# Altium PCB Control Board 4Layer.PcbDoc (part 2 of 2)
Units mm, origin at the board's own origin, x right, y up, seen from the top; angles counter-clockwise.
Board outline 113.54 x 134.37 mm, 4 copper layers (Top Layer, GND, Power, Bottom Layer), stack 0.603 mm thick; 245 components, 154 nets, 759 pads, 365 vias.
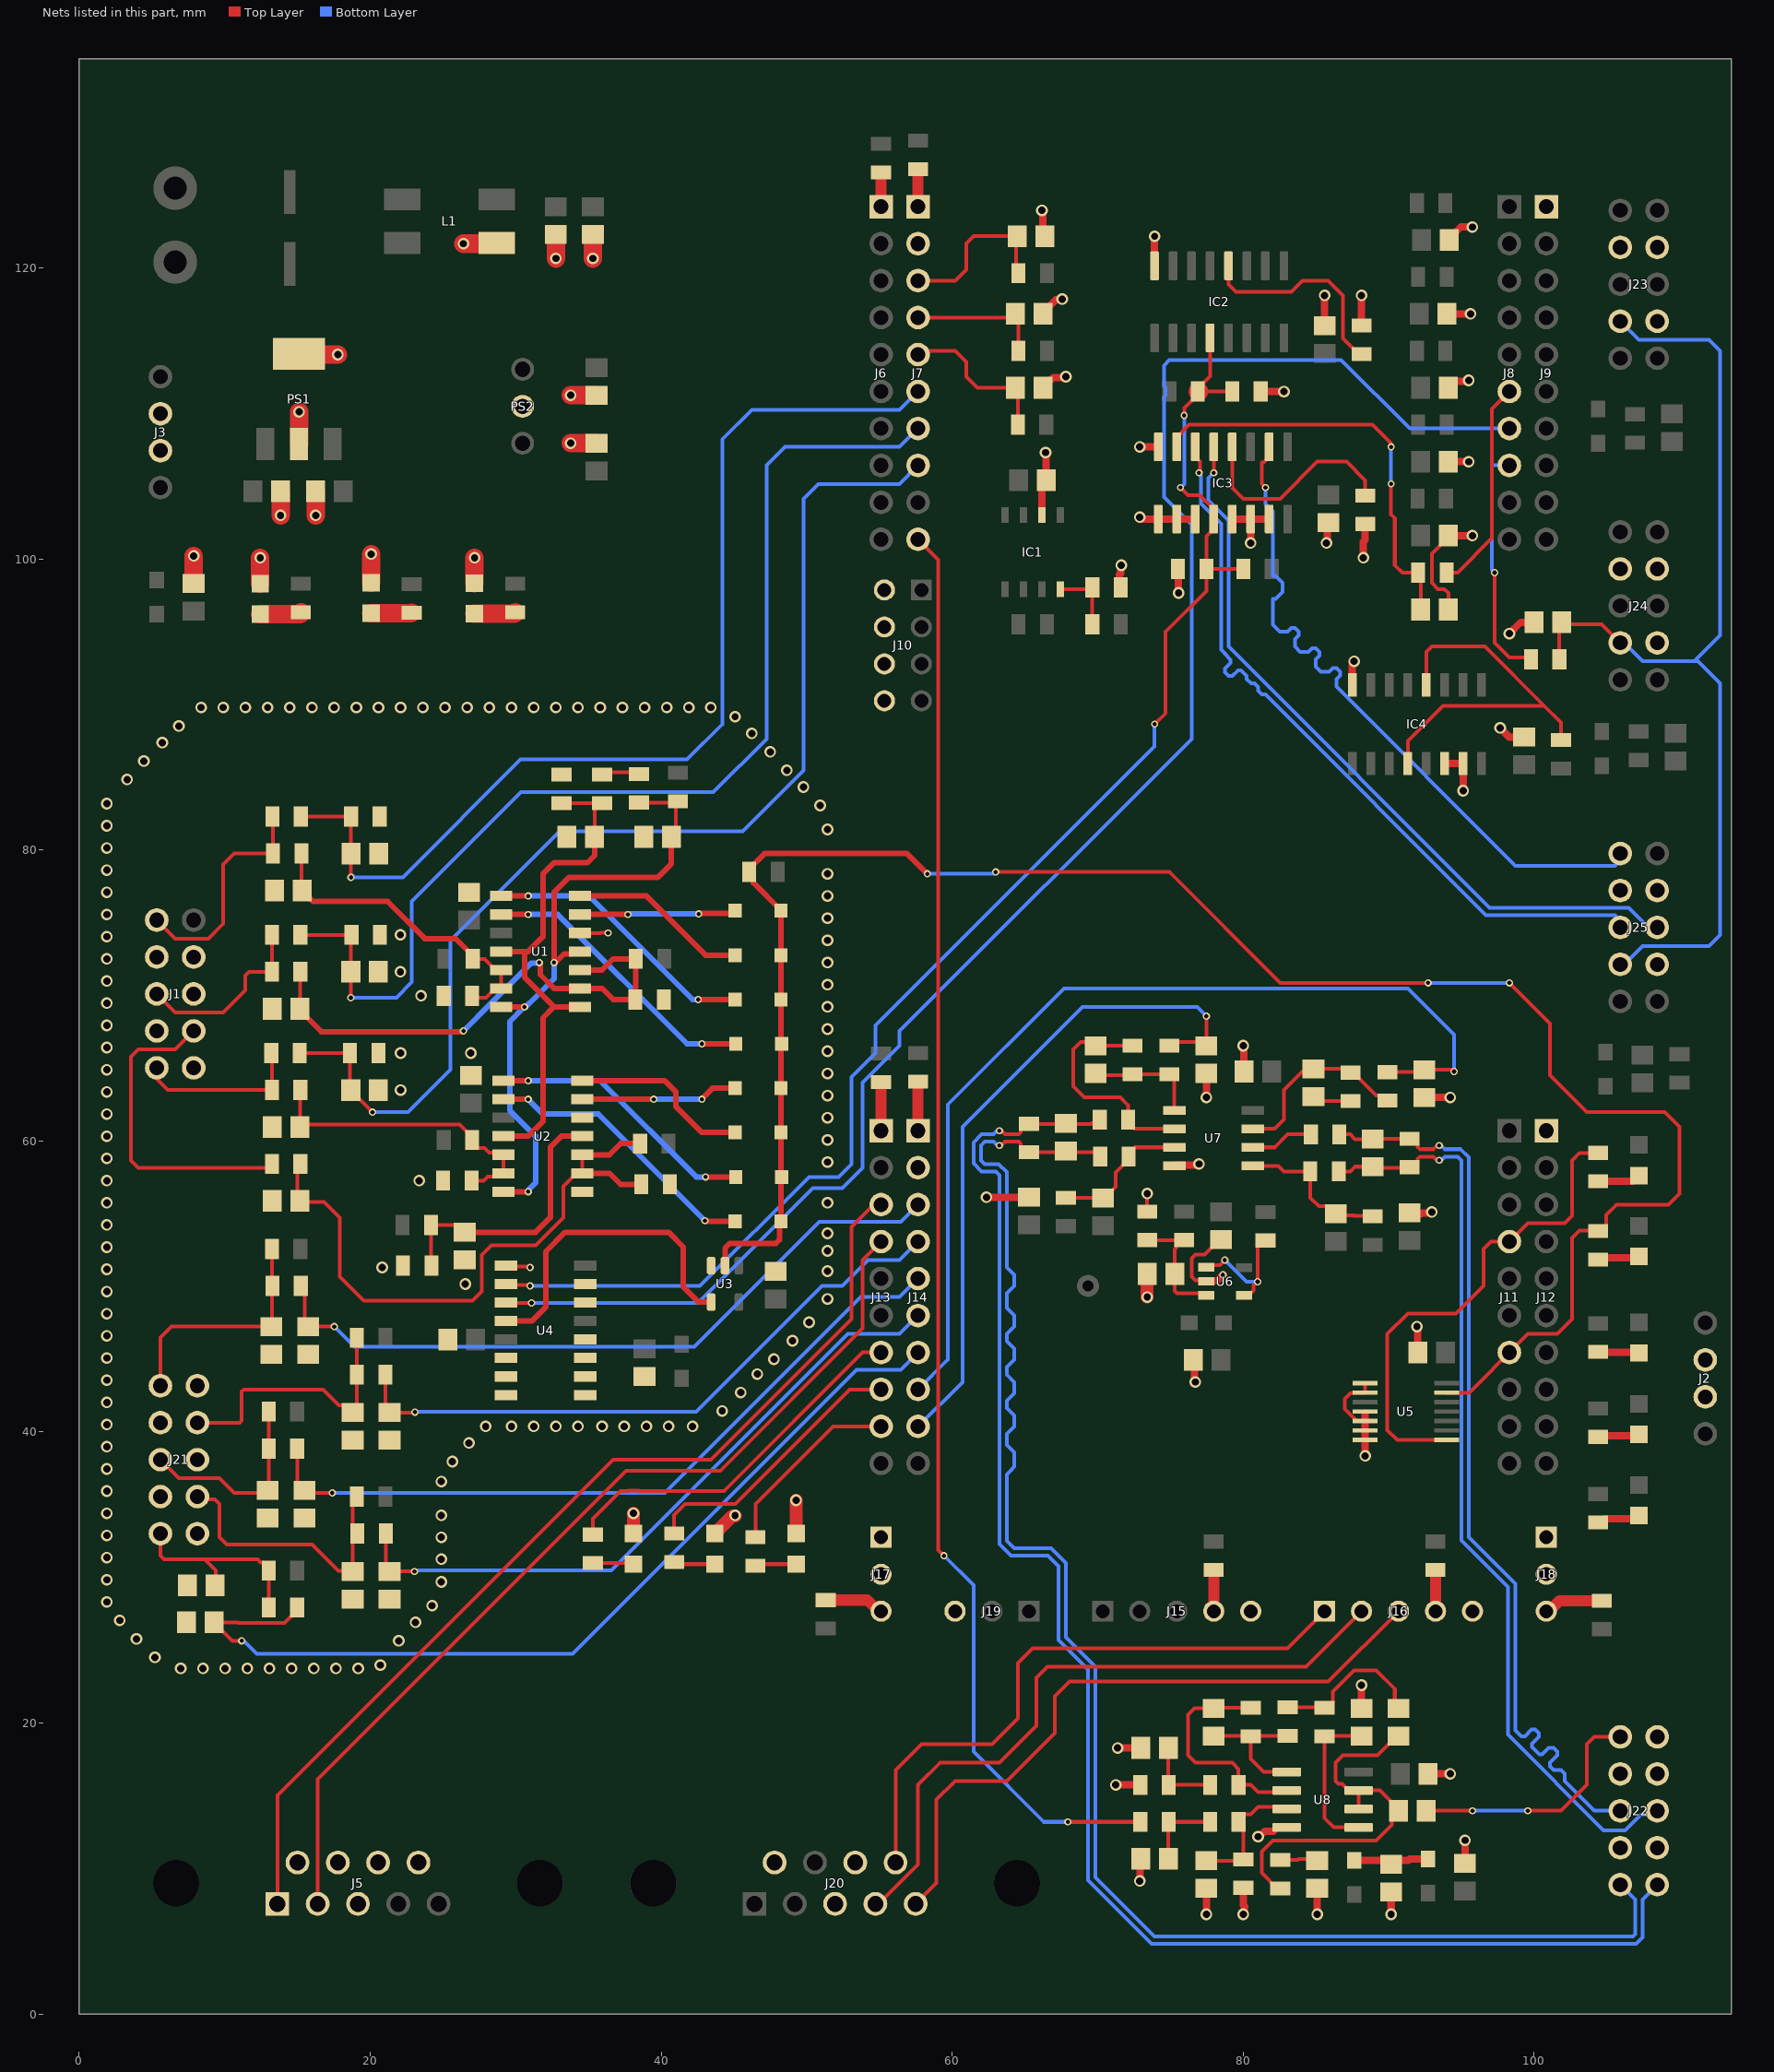
[diagram p4: the nets of this part, all layers, seen from the top]

## Via types
v1: diameter 0.8, hole 0.5, Top Layer to Bottom Layer, 279 vias
v2: diameter 0.5, hole 0.3, Top Layer to Bottom Layer, 82 vias
v3: diameter 3.5, hole 3.2, Top Layer to Bottom Layer, 4 vias

## Nets (pads, with @x,y where several pads share a name; then routed paths per layer and width w, separated by ;. In a path a pad name is that pad's centre, name@x,y a point inside that pad or via, vN(x,y) a via of type N, cw(c..) or ccw(c..) an arc to the next point about the centre after c; other vN are vias at no path point) (continued)
CHS_PWM_P: IC3.2 J25.1 | length 48.6
  Top Layer w0.254: v2(81.534,104.902) 81.534,104.92 81.28,105.174 81.28,106.619 81.396,106.619 81.788,107.011 IC3.2@81.788,107.696
  Bottom Layer w0.254: v2(81.534,104.902) 81.534,103.768 82.03,103.272 82.03,98.825 82.238,98.825 82.696,98.367 82.696,97.721 82.238,97.263 82.03,97.263 82.03,95.473 82.506,94.996 83.058,94.996 83.312,95.25 83.566,95.25 83.82,94.996 83.82,94.742 83.566,94.488 83.566,93.98 83.925,93.621 84.477,93.621 84.731,93.875 84.985,93.875 85.239,93.621 85.239,93.367 84.985,93.113 84.985,92.605 85.344,92.246 85.896,92.246 86.15,92.5 86.404,92.5 86.658,92.246 86.658,91.992 86.404,91.738 86.404,91.23 98.718,78.915 105.539,78.915 106.172,79.548 J25.1@106.172,79.756
CLS-PWM: J8.6 R100.1 | length 14.7
  Top Layer w0.254: R100.1@93.98,99.06 94.742,99.06 97.107,101.425 97.107,110.315 J8.6@98.298,111.506
CLS_PWM_FILT: C76.1 IC3.7 R100.2 | length 28.9
  Top Layer w0.254: IC3.7@75.438,107.696 75.438,108.381 76.277,109.22 88.9,109.22 90.168,107.952 ; v2(90.17,105.156) 90.17,103.038 90.424,102.784 90.424,99.568 90.932,99.06 R100.2@92.024,99.06 92.202,98.882 C76.1@92.202,96.52
  Bottom Layer w0.254: v2(90.17,105.156) v2(90.17,107.696)
CLS_PWM_N: IC3.5 J25.6 | length 52.2
  Top Layer w0.254: v2(77.978,105.918) IC3.5@77.978,107.696
  Bottom Layer w0.254: v2(77.978,105.918) 77.953,105.918 77.597,105.562 77.597,104.031 78.994,102.634 78.994,93.98 96.949,76.025 106.507,76.025 107.595,74.937 108.451,74.937 J25.6@108.712,74.676
CLS_PWM_P: IC3.6 J25.5 | length 52.1
  Top Layer w0.254: IC3.6@76.708,107.696 76.708,107.011 77.025,106.693 77.025,106.066 76.962,106.002 v2(76.962,105.918)
  Bottom Layer w0.254: v2(76.962,105.918) 76.962,105.851 77.089,105.724 77.089,103.821 78.486,102.424 78.486,93.77 78.74,93.516 78.74,93.472 79.143,93.069 79.143,92.859 78.74,92.456 78.74,92.202 78.994,91.948 79.248,91.948 79.651,92.351 79.861,92.351 80.249,91.963 80.249,91.753 80.562,91.44 80.772,91.44 81.026,91.186 81.026,90.932 81.28,90.678 81.534,90.678 96.695,75.517 105.539,75.517 106.172,74.884 J25.5@106.172,74.676
COS_N: C58.1 J22.6 R77.2 R80.2 | length 63.7
  Top Layer w0.254: R80.2@86.576,57.912 87.376,57.912 87.696,58.232 C58.1@88.9,58.232 88.966,58.166 91.402,58.166 R77.2@91.44,58.204 91.638,58.204 91.991,58.557 91.991,58.779 92.14,58.928 93.081,58.928 93.335,58.674 v2(93.472,58.674)
  Bottom Layer w0.254: v2(93.472,58.674) 93.609,58.674 93.863,58.928 94.742,58.928 94.996,58.674 94.996,32.556 98.193,29.359 98.193,19.199 104.771,12.621 106.253,12.621 107.341,13.709 108.197,13.709 J22.6@108.458,13.97
COS_P: C58.2 J22.5 R75.2 R77.1 | length 63.7
  Top Layer w0.254: R75.2@86.614,60.452 87.376,60.452 87.696,60.132 C58.2@88.9,60.132 88.928,60.16 R77.1@91.44,60.16 91.638,60.16 91.991,59.807 91.991,59.585 92.14,59.436 93.081,59.436 93.335,59.69 v2(93.472,59.69)
  Bottom Layer w0.254: v2(93.472,59.69) 93.609,59.69 93.863,59.436 94.952,59.436 95.504,58.884 95.504,32.766 98.701,29.569 98.701,19.503 99.107,19.097 99.361,19.097 99.822,19.558 100.076,19.558 100.33,19.304 100.33,19.05 99.847,18.567 99.847,18.357 100.352,17.852 100.562,17.852 100.998,18.288 101.346,18.288 101.6,18.034 101.6,17.78 101.092,17.272 101.092,17.018 101.346,16.764 101.854,16.764 102.108,16.51 102.108,16.002 104.14,13.97 J22.5@105.918,13.97
CPU_RES_COS: C50.1 J14.8 R66.2 | length 67.1
  Top Layer w0.254: R66.2@89.916,64.732 92.296,64.732 C50.1@92.456,64.892 94.366,64.892 v2(94.488,64.77)
  Bottom Layer w0.254: J14.8@57.658,42.926 59.69,44.958 59.69,62.484 67.691,70.485 91.313,70.485 94.488,67.31 v2(94.488,64.77)
CPU_RES_REF: J7.10 R78.1 | length 98.4
  Top Layer w0.254: J7.10@57.658,101.346 59.055,99.949 59.055,31.877 v2(59.436,31.496) ; v2(67.952,13.208) 71.12,13.208 R78.1@72.936,13.208
  Bottom Layer w0.254: v2(59.436,31.496) 61.468,29.464 61.468,18.034 66.294,13.208 v2(67.952,13.208)
CPU_RES_SIN: C47.1 J14.9 R65.2 | length 47
  Top Layer w0.254: R65.2@74.93,66.802 77.216,66.802 C47.1@77.47,66.548 v2(77.47,68.58)
  Bottom Layer w0.254: J14.9@57.658,40.386 60.706,43.434 60.706,60.96 68.961,69.215 76.835,69.215 v2(77.47,68.58)
CPU_Temp_BusBar: C33.1 J14.5 R54.2 | length 51.4
  Top Layer w0.254: R54.2@14.986,38.862 14.986,36.51 C33.1@15.494,36.002 15.682,35.814 v2(17.394,35.814)
  Bottom Layer w0.254: v2(17.394,35.814) 40.259,35.814 53.721,49.276 56.388,49.276 J14.5@57.658,50.546
CPU_Temp_BusCAP: C35.1 J14.3 R57.2 | length 49.5
  Top Layer w0.254: R57.2@15.24,50.038 15.494,49.784 15.494,47.498 C35.1@15.748,47.244 v2(17.526,47.244)
  Bottom Layer w0.254: v2(17.526,47.244) 18.923,45.847 42.291,45.847 50.879,54.435 56.467,54.435 J14.3@57.658,55.626
CPU_Temp_IGBT1: C32.1 J14.4 R53.2 | length 43.9
  Top Layer w0.254: R53.2@21.044,43.942 21.044,41.628 C32.1@21.336,41.336 23.048,41.336 v2(23.081,41.369) v2@23.114,41.402
  Bottom Layer w0.254: v2@23.114,41.402 42.418,41.402 51.054,50.038 52.451,50.038 54.229,51.816 56.388,51.816 J14.4@57.658,53.086
CPU_Temp_IGBT2: C37.1 J14.6 R58.2 | length 46.3
  Top Layer w0.254: R58.2@21.082,33.02 21.082,30.668 C37.1@21.336,30.414 v2(23.048,30.414)
  Bottom Layer w0.254: v2(23.048,30.414) 23.095,30.461 23.269,30.461 23.288,30.48 36.576,30.48 52.832,46.736 56.388,46.736 J14.6@57.658,48.006
CPU_Temp_IGBT3: C39.1 J14.7 R60.2 | length 64.2
  Top Layer w0.254: v2(11.176,25.654) 10.536,25.654 C39.1@9.266,26.924 10.922,26.924 10.977,26.869 14.125,26.869 14.986,27.73 R60.2@14.986,27.94
  Bottom Layer w0.254: v2(11.176,25.654) 11.313,25.654 12.202,24.765 33.909,24.765 53.419,44.275 56.467,44.275 J14.7@57.658,45.466
Current-A: C4.1 J7.6 R4.2 R7.2 | length 72
  Top Layer w0.254: R4.2@15.24,82.296 R7.2@18.694,82.296 18.684,82.286 C4.1@18.684,79.756 v2(18.684,78.12)
  Bottom Layer w0.254: v2(18.684,78.12) 18.796,78.232 18.908,78.12 22.24,78.12 30.334,86.214 41.764,86.214 44.196,88.646 44.196,108.204 46.228,110.236 56.388,110.236 J7.6@57.658,111.506
Current-B: C5.1 J7.7 R5.2 R8.2 | length 77.3
  Top Layer w0.254: R5.2@15.202,74.168 R8.2@18.72,74.168 18.674,74.122 C5.1@18.674,71.628 v2(18.674,69.85)
  Bottom Layer w0.254: v2(18.674,69.85) 21.803,69.85 22.86,70.907 22.86,76.454 30.375,83.969 43.583,83.969 47.244,87.63 47.244,106.426 48.514,107.696 56.388,107.696 J7.7@57.658,108.966
Current-C: C6.1 J7.8 R6.2 R9.2 | length 80.2
  Top Layer w0.254: R6.2@15.164,66.04 R9.2@18.618,66.04 18.618,63.556 C6.1@18.674,63.5 18.674,63.461 v2(20.159,61.976)
  Bottom Layer w0.254: v2(20.159,61.976) 22.606,61.976 25.527,64.897 25.527,73.787 33.02,81.28 45.593,81.28 49.784,85.471 49.784,104.14 50.8,105.156 56.388,105.156 J7.8@57.658,106.426
CVSense_Fault: D1.2 D2.2 D3.2 D4.2 D5.2 D6.2 D7.2 D8.2 J11.7 R13.1 R44.1 U3.2 U5.13 | length 135.9
  Top Layer w0.254: v2(62.992,78.486) 74.93,78.486 82.55,70.866 v2(92.71,70.866) ; U5.13@93.986,42.702 95.534,42.702 96.012,43.18 J11.7@98.298,45.466 99.568,46.736 101.6,46.736 102.616,47.752 102.616,53.34 103.124,53.848 104.642,53.848 104.957,54.163 104.957,54.919 105.664,55.626 109.22,55.626 109.982,56.388 109.982,60.96 108.966,61.976 103.632,61.976 101.092,64.516 101.092,68.072 v2(98.298,70.866)
  Top Layer w0.381: U3.2@44.389,51.435 44.389,52.639 44.709,52.959 47.879,52.959 48.133,53.213 48.133,54.381 D8.2@48.235,54.483 48.235,57.531 D6.2@48.235,60.579 D5.2@48.235,63.627 48.235,66.675 D3.2@48.235,69.723 D2.2@48.235,72.771 D1.2@48.235,75.819 48.235,75.844 46.34,77.739 46.34,78.196 R13.1@46.05,78.486 46.05,78.696 47.11,79.756 56.896,79.756 v2(58.293,78.359)
  Bottom Layer w0.254: v2(58.293,78.359) 62.865,78.359 v2(62.992,78.486) ; v2(92.71,70.866) v2(98.298,70.866)
enable: IC4.4 IC4.12 R94.1 | length 27.1
  Top Layer w0.254: IC4.12@91.313,85.946 91.313,87.503 93.726,89.916 100.689,89.916 ; IC4.4@92.583,91.346 92.616,91.346 92.71,91.44 92.583,91.567 92.583,93.599 92.964,93.98 96.625,93.98 100.689,89.916 ; R94.1@101.854,87.554 101.854,88.751 100.689,89.916
GD-RESET: J8.8 R37.1 | length 16.6
  Top Layer w0.254: v2(97.282,99.06) 97.282,94.234 98.298,93.218 99.568,93.218 99.776,93.01 R37.1@99.776,93.106
  Bottom Layer w0.254: v2(97.282,99.06) 97.107,99.235 97.107,106.426 J8.8@98.298,106.426
GD_RESET_FILT: C28.1 J23.7 J24.7 J25.7 R37.2 | length 70
  Top Layer w0.254: R37.2@101.732,93.106 101.732,95.486 C28.1@101.892,95.646 102.034,95.504 104.648,95.504 J24.7@105.918,94.234
  Bottom Layer w0.254: J23.7@105.664,116.332 J23.7@105.918,116.332 107.188,115.062 112.014,115.062 112.776,114.3 112.776,94.742 110.998,92.964 ; J24.7@105.918,94.234 106.172,94.234 107.442,92.964 110.998,92.964 ; J25.7@106.172,72.136 107.442,73.406 112.014,73.406 112.776,74.168 112.776,91.44 111.252,92.964 110.998,92.964
GLOBALFAULT: J11.4 R101.1 U5.8 | length 34.3
  Top Layer w0.254: U5.8@93.986,39.452 90.596,39.452 89.916,40.132 89.916,46.736 91.313,48.133 94.615,48.133 96.52,50.038 96.52,52.578 97.028,53.086 J11.4@98.298,53.086 99.568,54.356 102.108,54.356 102.616,54.864 102.616,58.674 103.124,59.182 R101.1@104.394,59.182
GND: C1.2 C2.2 C3.2 C4.2 C5.2 C6.2 C7.2 C8.1 C9.1 C10.2 C11.2 C12.2 C13.2 C14.2 C16.2 C17.2 C18.1 C19.1 C20.1 C21.1 C22.2 C23.1 C24.2 C25.2 C26.2 C27.2 C28.2 C29.1 C30.2 C31.2 C32.2 C33.2 C34.2 C35.2 C36.2 C37.2 C38.2 C39.2 C40.2 C41.2 C42.1 C43.2 C44.2 C47.2 C49.1 C50.2 C51.2 C52.1 C56.2 C57.1 C61.2 C62.2 C63.2 C64.2 C65.2 C69.2 C70.2 C71.2 C72.1 C73.2 C74.2 C75.2 C76.2 D9.1 D10.1 D11.1 D12.1 D13.1 D14.1 IC1.2 IC2.8 IC3.8 IC3.9 IC3.10 IC3.11 IC3.13 IC3.14 IC3.15 IC4.8 IC4.14 IC4.15 J1.3 J1.4 J1.6 J1.7 J1.10 J2.2 J2.3 J3.2 J3.3 J5.3 J5.6 J5.7 J5.8 J5.9 J7.2 J9.1 J10.2 J10.4 J10.6 J10.8 J12.1 J14.2 J15.5 J16.5 J17.1 J17.2 J18.1 J18.2 J19.3 J20.3 J20.6 J20.8 J21.2 J21.3 J21.6 J21.7 J21.10 J22.2 J22.3 J22.4 J22.7 J22.8 J23.3 J23.4 J23.8 J24.3 J24.4 J24.8 J25.3 J25.4 J25.8 L1.3 PS1.2 PS1.4 PS2.2 R7.1 R8.1 R9.1 R14.1 R15.2 R17.1 R19.2 R24.1 R25.1 R29.2 R63.1 R72.1 R82.1 R87.1 R89.1 R95.1 R97.1 U1.12 U2.8 U2.12 U3.3 U4.1 U4.6 U4.7 U4.8 U4.9 U4.10 U4.11 U4.12 U4.14 U4.15 U5.1 U5.2 U5.4 U5.5 U5.6 U5.7 U6.2 U7.4 U8.4 | length 142.7
  Top Layer w0.254: U4.1@29.337,51.435 29.4,51.371 30.924,51.371 v2(30.988,51.308) ; U1.12@34.417,74.295 35.804,74.295 35.802,74.297 v2(36.351,74.297) ; R63.1@73.406,55.146 v1(73.406,56.388) ; U6.2@77.47,50.358 77.409,50.419 76.708,50.419 76.454,50.673 76.454,51.943 76.708,52.197 77.365,52.197 78.386,53.218 C42.1@78.486,53.218 ; U5.2@88.386,42.702 87.533,42.702 87.503,42.672 87.376,42.672 86.995,42.291 86.995,41.573 87.816,40.752 U5.5@88.645,40.752 ; U5.2@88.386,42.71 U5.1@88.386,43.352 ; C76.2@94.102,96.52 94.102,97.651 93.821,97.932 93.4,97.932 92.964,98.367 92.964,100.362 94.102,101.5 C75.2@94.102,101.6
  Top Layer w0.508: PS1.4@15.113,114.097 15.951,114.097 PS1.4@16.256,113.792 ; v1(62.357,56.134) C63.2@65.278,56.134 ; IC1.2@66.167,103.017 IC1.2@66.167,103.017 66.168,105.096 C24.2@66.482,105.41 66.452,105.441 66.452,107.284 v1(66.421,107.315) ; v1(66.167,123.952) 66.223,123.896 66.223,122.329 C27.2@66.378,122.174 ; C25.2@66.256,111.76 66.256,111.86 66.652,112.256 66.752,112.256 66.962,112.466 67.762,112.466 v1(67.818,112.522) ; C26.2@66.256,116.84 66.256,116.94 67.116,117.8 67.508,117.8 v1(67.564,117.856) ; v1(71.247,15.748) R72.1@72.936,15.748 ; v1(71.374,18.288) C56.2@72.964,18.288 ; R29.2@71.59,98.044 71.501,98.133 71.501,98.933 71.572,99.004 71.572,99.512 v1(71.628,99.568) ; v1(72.898,9.144) 72.931,9.177 72.931,10.635 C57.1@72.964,10.668 ; v1(72.898,102.87) 72.977,102.87 73.101,102.746 IC3.9@74.168,102.746 IC3.10@75.438,102.746 IC3.11@76.708,102.746 ; v1(72.898,107.696) IC3.8@74.168,107.696 ; IC2.8@73.914,120.142 v1(73.914,122.174) ; U7.4@75.278,58.293 75.324,58.339 76.802,58.339 76.883,58.42 v1(76.962,58.42) ; R95.1@75.514,99.314 75.54,99.289 75.54,97.688 v1(75.565,97.663) ; C44.2@76.586,44.958 76.652,44.892 76.652,43.49 v1(76.708,43.434) ; v1(77.47,6.858) C61.2@77.47,8.636 ; U6.2@77.47,50.358 77.516,50.404 78.217,50.404 v2(78.613,50.8) ; v1(77.47,62.992) C47.2@77.47,64.648 ; IC3.13@79.248,102.746 IC3.14@80.518,102.746 ; v1(80.01,6.858) 80.066,6.914 80.066,7.335 80.117,7.386 80.01,7.493 R82.1@80.01,8.674 ; v1(80.01,66.548) 80.043,66.515 80.043,64.803 C51.2@80.076,64.77 ; v1(80.518,101.092) IC3.14@80.518,102.746 ; v1(81.026,12.192) 81.105,12.192 81.486,12.573 82.062,12.573 82.316,12.827 U8.4@83.001,12.827 ; R87.1@81.204,111.506 v1(82.804,111.506) ; IC3.15@81.788,102.746 IC3.14@80.518,102.746 ; v1(85.09,6.858) C62.2@85.09,8.636 ; C65.2@85.598,116.012 v1(85.598,118.11) ; v1(85.725,101.092) 85.781,101.148 85.781,102.423 C70.2@85.852,102.494 ; IC4.8@87.503,91.346 87.503,92.758 87.63,92.885 v1(87.63,92.964) ; C49.1@88.138,21.016 v1(88.138,22.606) ; R89.1@88.138,116.04 v1(88.138,118.11) ; v1(88.265,100.076) 88.265,101.171 88.392,101.298 R97.1@88.392,102.4 ; v1(88.392,38.354) U5.4@88.392,41.298 ; v1(90.17,6.858) C40.2@90.17,8.382 ; C64.2@91.44,55.052 91.501,54.991 92.202,54.991 92.273,55.062 92.908,55.062 v1(92.964,55.118) ; v1(91.948,47.244) 91.981,47.211 91.981,45.499 C22.2@92.014,45.466 ; C50.2@92.456,62.992 v1(94.234,62.992) ; C52.1@92.71,16.51 v1(94.234,16.51) ; IC4.14@93.853,85.946 IC4.15@95.123,85.946 v1(95.123,84.074) ; C71.2@93.99,116.84 v1(95.631,116.84) ; C75.2@94.102,101.6 v1(95.758,101.6) ; C74.2@94.102,106.68 v1(95.504,106.68) ; C73.2@94.102,111.76 94.102,111.816 94.498,112.212 95.448,112.212 v1(95.504,112.268) ; C69.2@94.168,121.92 94.361,121.92 94.361,122.213 94.957,122.809 v1(95.758,122.809) ; C41.2@95.25,10.348 v1(95.25,11.938) ; v1(97.663,88.392) 98.303,87.752 C72.1@99.314,87.752 ; v1(98.298,94.869) 99.075,95.646 C28.2@99.992,95.646
  Top Layer w0.889: D12.1@38.1,33.02 v1(38.1,34.417) ; D13.1@43.688,33.02 44.895,34.227 v1@45.085,34.227 ; D14.1@49.276,33.02 v1(49.276,35.306) ; v1(73.406,49.276) C43.2@73.406,50.866
  Top Layer w1.27: C23.1@7.874,98.298 v1(7.874,100.203) ; D10.1@12.446,98.298 v1(12.446,100.076) ; C18.1@13.838,104.648 13.843,104.643 v1(13.843,102.997) ; PS1.2@15.113,107.899 v1(15.113,110.109) ; v1(16.256,102.997) C20.1@16.256,104.648 ; PS1.4@16.256,113.792 16.256,114.024 16.278,114.046 v1(17.78,114.046) ; D11.1@20.066,98.366 v1(20.066,100.33) ; v1(26.416,121.666) 28.654,121.666 L1.3@28.702,121.714 ; D9.1@27.178,98.332 v1(27.178,100.076) ; v1(32.766,120.65) C16.2@32.766,122.306 ; v1(33.782,107.95) C19.1@35.56,107.95 ; v1(33.782,111.252) C21.1@35.56,111.252 ; v1(35.306,120.65) C17.2@35.306,122.306
  other v1: 6.985,23.749 8.509,23.749 10.033,23.749 11.557,23.749 13.081,23.749 14.605,23.749 16.129,23.749 17.653,23.749 19.177,23.749 20.701,23.984 5.207,24.511 21.971,25.654 3.937,25.781 23.114,26.924 2.794,27.051 24.257,28.067 1.905,28.321 24.892,29.699 1.905,29.845 24.892,31.261 1.905,31.369 24.892,32.766 1.905,32.893 24.892,34.271 45.085,34.271 1.905,34.417 1.905,35.941 24.892,36.595 1.905,37.465 25.654,37.973 1.905,38.989 26.797,39.243 27.94,40.386 29.718,40.386 31.242,40.386 32.766,40.386 34.29,40.386 35.941,40.386 37.465,40.386 38.989,40.386 40.513,40.386 42.164,40.386 1.905,40.513 44.198,41.446 1.905,42.037 45.468,42.716 1.905,43.561 46.611,43.986 47.754,45.002 1.905,45.085 49.024,46.272 1.905,46.609 50.167,47.542 1.905,48.133 51.435,49.149 1.905,49.657 26.543,50.165 51.435,51.054 1.905,51.181 20.828,51.308 51.435,52.451 1.905,52.705 51.435,53.654 1.905,54.229 1.905,55.753 51.435,55.753 1.905,57.277 23.368,57.277 51.435,58.547 1.905,58.801 51.435,60.071 1.905,60.325 51.435,61.595 1.905,61.849 51.435,63.119 1.905,63.373 22.098,63.5 51.435,64.643 1.905,64.897 22.098,66.04 26.924,66.04 51.435,66.167 1.905,66.421 51.435,67.691 1.905,67.945 51.435,69.215 1.905,69.469 23.495,69.977 51.435,70.739 1.905,70.993 22.079,71.628 51.435,72.263 1.905,72.517 51.435,73.787 1.905,74.041 22.079,74.168 51.435,75.311 1.905,75.565 51.435,76.835 1.905,77.089 51.435,78.359 1.905,78.613 1.905,80.137 51.435,81.407 1.905,81.661 50.927,83.058 1.905,83.185 49.784,84.328 3.302,84.836 48.641,85.471 4.445,86.106 47.498,86.741 5.715,87.376 46.228,88.011 6.858,88.519 45.085,89.154 8.382,89.789 9.906,89.789 11.43,89.789 12.954,89.789 14.478,89.789 16.002,89.789 17.526,89.789 19.05,89.789 20.574,89.789 22.098,89.789 23.622,89.789 25.146,89.789 26.67,89.789 28.194,89.789 29.718,89.789 31.242,89.789 32.766,89.789 34.29,89.789 35.814,89.789 37.338,89.789 38.862,89.789 40.386,89.789 41.91,89.789 43.415,89.789
HighLimit: C12.1 R20.1 R21.2 U1.7 U1.11 U2.7 | length 44.3
  Top Layer w0.254: R21.2@38.481,83.261 40.983,83.261 41.021,83.223 41.021,81.219 C12.1@40.701,80.899
  Top Layer w0.381: U1.7@28.993,69.215 v2(30.607,69.215) ; U2.7@29.165,56.515 v2(30.861,56.515) ; U1.11@34.417,73.025 34.005,73.025 33.861,73.169 33.861,73.025 33.861,72.881 33.845,72.865 33.345,72.865 32.742,72.263 v2(32.639,72.263) 32.639,77.089 33.655,78.105 39.751,78.105 40.701,79.055 C12.1@40.701,80.899
  Bottom Layer w0.381: v2(30.861,56.515) 30.861,56.618 31.369,57.126 31.369,60.325 29.591,62.103 29.591,68.199 v2(30.607,69.215) 30.71,69.215 31.369,69.874 32.639,71.144 v2(32.639,72.263)
IA_CSensor: J1.1 R1.1 R4.1 | length 15.9
  Top Layer w0.254: J1.1@5.334,75.184 6.604,73.914 8.89,73.914 9.906,74.93 9.906,78.994 10.668,79.756 R1.1@13.322,79.756 13.322,82.258 R4.1@13.284,82.296
IA_Filtered: C1.1 R1.2 R11.2 R14.2 U1.5 U1.6 | length 22.2
  Top Layer w0.254: C1.1@15.278,77.254 R1.2@15.278,79.756 ; R14.2@27.013,69.977 27.14,69.85 27.945,69.85 28.58,70.485 U1.6@28.993,70.485 U1.5@28.993,71.755 28.58,71.755 28.357,71.978 28.357,72.009 27.85,72.517 R11.2@27.051,72.517
  Top Layer w0.381: C1.1@15.316,77.216 15.316,77.116 15.776,76.656 15.876,76.656 16.078,76.454 21.209,76.454 23.749,73.914 25.864,73.914 27.051,72.727 R11.2@27.051,72.517
IB_CSensor: J1.5 R2.1 R5.1 | length 12.7
  Top Layer w0.254: J1.5@5.334,70.104 6.604,68.834 9.906,68.834 11.43,70.358 11.43,71.374 11.684,71.628 R2.1@13.246,71.628 R5.1@13.246,74.168
IB_Filtered: C2.1 R2.2 R12.1 R15.1 U1.9 U1.10 | length 36.8
  Top Layer w0.254: C2.1@15.174,69.088 15.202,69.116 R2.2@15.202,71.628
  Top Layer w0.381: C2.1@15.174,69.088 15.174,68.988 16.662,67.501 26.352,67.501 v2(26.416,67.564) ; v2(31.623,72.263) 31.696,72.19 31.696,71.428 32.639,70.485 U1.9@34.417,70.485 35.941,70.485 36.703,69.723 R15.1@38.227,69.723 38.246,69.742 38.246,72.498 R12.1@38.265,72.517 36.703,72.517 35.941,71.755 U1.10@34.417,71.755
  Bottom Layer w0.381: v2(26.416,67.564) 28.321,69.469 31.076,72.224 31.584,72.224 v2(31.623,72.263)
IC_CSensor: J1.9 R3.1 R6.1 | length 11.5
  Top Layer w0.254: J1.9@5.334,65.024 5.334,64.262 6.096,63.5 R3.1@13.246,63.5 13.246,66.002 R6.1@13.208,66.04
IC_Filtered: C3.1 R3.2 R16.2 R17.2 U2.5 U2.6 | length 21.4
  Top Layer w0.254: R3.2@15.202,63.5 15.174,63.472 C3.1@15.174,60.96 15.356,61.142 26.152,61.142 27.013,60.281 27.013,59.861 27.366,59.508 27.868,59.508 28.171,59.205 29.015,59.205 U2.5@29.165,59.055 U2.6@29.165,57.785 28.942,57.562 28.098,57.562 27.813,57.277 R17.2@26.975,57.277
LED-A: J13.7 R45.2 | length 25.7
  Top Layer w0.254: R45.2@35.306,32.944 35.306,34.036 37.211,35.941 37.714,35.941 37.758,35.985 38.442,35.985 38.486,35.941 44.323,35.941 53.848,45.466 J13.7@55.118,45.466
LED-B: J13.8 R46.2 | length 19.1
  Top Layer w0.254: R46.2@40.894,33.02 40.894,34.29 41.656,35.052 45.085,35.052 52.959,42.926 J13.8@55.118,42.926
LED-C: J13.9 R47.2 | length 13.1
  Top Layer w0.254: R47.2@46.482,32.766 46.482,35.052 51.816,40.386 J13.9@55.118,40.386
LowLimit: C14.1 R23.1 R25.2 U1.4 U1.8 U2.4 | length 36
  Top Layer w0.254: R25.2@33.147,83.223 R23.1@35.786,83.223 ; C14.1@35.433,80.899 35.433,82.87 R23.1@35.786,83.223 ; R23.1@35.941,83.223 R23.1@35.786,83.223
  Top Layer w0.381: U1.4@28.993,73.025 30.607,73.025 ; U2.4@29.165,60.325 30.861,60.325 31.877,61.341 31.877,68.453 32.639,69.215 ; U1.8@34.417,69.215 32.639,69.215 ; C14.1@35.433,80.899 35.433,79.629 34.925,79.121 32.639,79.121 31.877,78.359 31.877,74.041 30.861,73.025 30.607,73.025 ; 30.607,73.025 30.607,71.247 32.639,69.215
NetC40_1: C40.1 L2.2 L3.1 | length 5.1
  Top Layer w0.508: L2.2@87.63,10.573 91.345,10.573 91.44,10.668 L3.1@92.71,10.668
NetC43_1: C43.1 R62.1 R63.2 U6.3 | length 8.5
  Top Layer w0.254: R63.2@73.406,53.19 R62.1@75.736,53.19 ; R62.1@75.946,53.19 R62.1@75.736,53.19 ; U6.3@77.47,49.398 77.338,49.53 75.455,49.53 75.306,49.679 75.306,52.55 75.383,52.627 75.383,52.837 R62.1@75.736,53.19
NetC45_1: C45.1 C55.2 R84.2 U8.6 U8.7 | length 26.8
  Top Layer w0.254: R84.2@82.55,8.636 82.34,8.636 81.28,9.696 81.28,11.176 82.042,11.938 89.154,11.938 89.408,12.192 90.217,13.001 90.217,13.509 C55.2@90.678,13.97 ; U8.6@87.941,14.097 U8.7@87.941,15.367 ; C55.2@90.678,14.07 89.381,15.367 U8.7@87.941,15.367 ; C45.1@90.678,19.116 90.578,19.116 89.242,17.78 86.868,17.78 86.36,17.272 86.36,16.002 86.54,15.822 86.801,15.822 87.09,15.533 87.775,15.533 U8.7@87.941,15.367
NetC45_2: C45.2 R68.2 R69.1 | length 10.9
  Top Layer w0.254: R68.2@83.058,21.082 85.56,21.082 R69.1@85.598,21.044 85.808,21.044 86.161,21.397 86.161,22.153 87.63,23.622 89.154,23.622 90.424,22.352 90.424,21.27 C45.2@90.678,21.016
NetC46_1: C46.1 R67.2 R68.1 U8.1 | length 9.5
  Top Layer w0.254: C46.1@77.978,19.116 77.988,19.126 80.518,19.126 R68.1@83.058,19.126 ; R67.2@80.518,19.088 80.518,17.526 81.407,16.637 U8.1@83.001,16.637
NetC46_2: C46.2 R67.1 R73.2 U8.2 | length 16.7
  Top Layer w0.254: R67.1@80.518,21.044 78.006,21.044 C46.2@77.978,21.016 76.642,21.016 76.2,20.574 76.2,17.78 76.708,17.272 79.248,17.272 79.68,16.84 R73.2@79.68,15.748 80.518,15.748 81.026,15.24 82.874,15.24 U8.2@83.001,15.367 83.693,15.367 U8.2@83.82,15.24
NetC48_1: C48.1 R64.2 R65.1 U7.1 | length 7.8
  Top Layer w0.254: C48.1@69.85,64.648 69.982,64.516 72.314,64.516 R64.2@72.39,64.592 R65.1@74.93,64.592 75.278,64.244 U7.1@75.278,62.103
NetC48_2: C48.2 R64.1 R71.2 U7.2 | length 15.8
  Top Layer w0.254: R64.1@72.39,66.548 C48.2@69.85,66.548 69.596,66.802 68.834,66.802 68.326,66.294 68.326,63.754 69.088,62.992 71.552,62.992 72.098,62.446 R71.2@72.098,61.468 72.098,61.258 72.523,60.833 U7.2@75.278,60.833
NetC49_2: C49.2 R69.2 U8.5 | length 11.6
  Top Layer w0.254: C49.2@87.63,18.542 87.63,18.608 C49.2@88.138,19.116 85.626,19.116 R69.2@85.598,19.088 85.598,13.462 86.211,12.849 87.919,12.849 U8.5@87.941,12.827
NetC53_1: C53.1 R70.2 | length 2.7
  Top Layer w0.254: C53.1@84.836,63.058 85.156,62.738 R70.2@87.376,62.738
NetC53_2: C53.2 R66.1 R70.1 U7.7 | length 13
  Top Layer w0.254: U7.7@80.678,60.833 82.169,60.833 82.804,61.468 82.804,63.5 84.074,64.77 84.648,64.77 C53.2@84.836,64.958 87.112,64.958 R70.1@87.376,64.694 87.586,64.694 89.151,63.129 89.563,63.129 R66.1@89.916,62.776
NetC56_1: C56.1 R72.2 R73.1 | length 5.4
  Top Layer w0.254: C56.1@74.864,18.288 74.864,15.776 R72.2@74.892,15.748 R73.1@77.724,15.748
NetC57_2: C57.2 R78.2 R79.1 | length 5.4
  Top Layer w0.254: C57.2@74.864,10.668 74.864,13.18 R78.2@74.892,13.208 R79.1@77.724,13.208
NetC59_1: C59.1 R76.2 R81.2 U7.3 | length 9.7
  Top Layer w0.254: R81.2@67.818,56.096 70.33,56.096 C59.1@70.358,56.068 70.458,56.068 71.247,56.857 71.247,57.829 72.136,58.718 72.136,59.138 72.561,59.563 U7.3@75.278,59.563
NetC60_1: C60.1 R80.1 R83.2 U7.5 | length 10.7
  Top Layer w0.254: U7.5@80.678,58.293 82.423,58.293 82.804,57.912 R80.1@84.62,57.912 84.62,56.096 85.207,55.509 85.837,55.509 86.444,54.902 87.592,54.902 87.63,54.864 88.862,54.864 R83.2@88.9,54.826
NetC61_1: C61.1 R79.2 R82.2 U8.3 | length 9.5
  Top Layer w0.254: C61.1@77.978,10.536 80.424,10.536 80.518,10.63 80.226,10.922 80.016,10.922 80.01,10.928 80.01,12.878 R79.2@79.68,13.208 79.68,13.363 80.033,13.716 80.518,13.716 81.026,14.224 82.874,14.224 U8.3@83.001,14.097
NetC62_1: C62.1 R84.1 | length 2.6
  Top Layer w0.254: R84.1@82.55,10.592 83.744,10.592 83.82,10.668 84.958,10.668 C62.1@85.09,10.536
NetD1_1: D1.1 U1.13 | length 10.8
  Top Layer w0.381: U1.13@34.417,75.565 v2(37.719,75.565) ; v2(42.581,75.601) 42.618,75.638 44.904,75.638 D1.1@45.085,75.819
  Bottom Layer w0.381: v2(37.719,75.565) 37.755,75.601 v2(42.581,75.601)
NetD2_1: D2.1 U1.14 | length 12.4
  Top Layer w0.381: U1.14@34.417,76.835 38.989,76.835 43.053,72.771 D2.1@45.085,72.771
NetD3_1: D3.1 U1.1 | length 19
  Top Layer w0.381: U1.1@28.993,76.835 v2(30.861,76.835) ; v2(42.545,69.723) D3.1@45.085,69.723
  Bottom Layer w0.381: v2(30.861,76.835) 35.052,76.835 42.155,69.732 42.536,69.732 v2(42.545,69.723)
NetD4_1: D4.1 U1.2 | length 19.8
  Top Layer w0.381: U1.2@28.993,75.565 v2(30.861,75.565) ; v2(42.799,66.675) D4.1@45.136,66.675
  Bottom Layer w0.381: v2(30.861,75.565) 32.893,75.565 41.783,66.675 v2(42.799,66.675)
NetD5_1: D5.1 U2.13 | length 10.8
  Top Layer w0.381: U2.13@34.589,62.865 v2(39.497,62.865) ; v2(42.799,62.865) 42.799,62.896 43.53,63.627 D5.1@45.085,63.627
  Bottom Layer w0.381: v2(39.497,62.865) v2(42.799,62.865)
NetD6_1: D6.1 U2.14 | length 12.6
  Top Layer w0.381: U2.14@34.589,64.135 40.259,64.135 41.021,63.373 41.021,62.357 42.799,60.579 D6.1@45.085,60.579
NetD7_1: D7.1 U2.1 | length 18.7
  Top Layer w0.381: U2.1@29.165,64.135 v2(30.861,64.135) ; v2(43.053,57.531) D7.1@45.136,57.531
  Bottom Layer w0.381: v2(30.861,64.135) 35.814,64.135 42.418,57.531 v2(43.053,57.531)
NetD8_1: D8.1 U2.2 | length 19.4
  Top Layer w0.381: U2.2@29.165,62.865 v2(30.861,62.865) ; v2(43.01,54.526) 43.053,54.483 D8.1@45.085,54.483
  Bottom Layer w0.381: v2(30.861,62.865) 31.877,61.849 35.687,61.849 v2(43.01,54.526)
NetD9_2: D9.2 R26.1 | length 2.9
  Top Layer w1.27: D9.2@27.178,96.232 29.917,96.232 29.972,96.287 R26.1@29.972,96.342
NetD10_2: D10.2 R27.1 | length 2.9
  Top Layer w1.27: D10.2@12.446,96.198 15.185,96.198 15.24,96.253 R27.1@15.24,96.342
NetD11_2: D11.2 R28.1 | length 2.8
  Top Layer w1.27: D11.2@20.066,96.266 22.822,96.266 R28.1@22.86,96.304
NetD12_2: D12.2 R45.1 | length 2.8
  Top Layer w0.254: R45.1@35.306,30.988 38.032,30.988 D12.2@38.1,30.92
NetD13_2: D13.2 R46.1 | length 3.1
  Top Layer w0.254: R46.1@40.894,31.064 40.894,31.242 41.216,30.92 D13.2@43.688,30.92
NetD14_2: D14.2 R47.1 | length 2.8
  Top Layer w0.254: R47.1@46.482,30.81 46.592,30.92 D14.2@49.276,30.92
NetD15_1: D15.1 R44.2 | length 2.9
  Top Layer w0.508: R44.2@104.394,51.854 104.502,51.962 107.08,51.962 D15.1@107.188,52.07
NetD16_1: D16.1 R48.2 | length 2.8
  Top Layer w0.508: R48.2@104.394,45.504 104.43,45.468 107.152,45.468 D16.1@107.188,45.432
NetD17_1: D17.1 R49.2 | length 2.9
  Top Layer w0.508: R49.2@104.394,39.662 104.485,39.753 107.097,39.753 D17.1@107.188,39.844
NetD18_1: D18.1 R50.2 | length 2.6
  Top Layer w0.508: R50.2@104.866,34.036 D18.1@107.478,34.036
NetD19_1: D19.1 R101.2 | length 3
  Top Layer w0.508: R101.2@104.394,57.226 106.79,57.226 D19.1@107.188,57.624
NetIC1_8: IC1.8 R29.1 R30.1 | length 4.8
  Top Layer w0.254: IC1.8@67.437,97.917 69.507,97.917 R29.1@69.634,98.044 R30.1@69.634,95.504
NetIC2_4: IC2.4 R89.2 | length 14.8
  Top Layer w0.254: IC2.4@78.994,120.142 78.994,118.872 79.502,118.364 83.312,118.364 84.074,119.126 85.852,119.126 86.868,118.11 86.868,115.144 87.928,114.084 R89.2@88.138,114.084
NetIC3_4: IC3.4 R97.2 | length 14.9
  Top Layer w0.254: IC3.4@79.248,107.696 79.248,104.902 80.01,104.14 82.55,104.14 85.09,106.68 87.122,106.68 88.392,105.41 R97.2@88.392,104.356
NetJ6_1: J6.1 R35.2 | length 2.4
  Top Layer w0.762: J6.1@55.118,124.206 R35.2@55.118,126.568
NetJ7_1: J7.1 R36.1 | length 2.6
  Top Layer w0.762: J7.1@57.658,124.206 R36.1@57.658,126.784
NetJ13_1: J13.1 R38.2 | length 3.3
  Top Layer w0.762: J13.1@55.118,60.706 R38.2@55.118,64.046
NetJ14_1: J14.1 R39.1 | length 3.4
  Top Layer w0.762: J14.1@57.658,60.706 R39.1@57.658,64.084
NetJ15_4: J15.4 R42.2 | length 2.8
  Top Layer w0.762: J15.4@77.978,27.686 R42.2@77.978,30.518
NetJ16_4: J16.4 R43.2 | length 2.8
  Top Layer w0.762: J16.4@93.218,27.686 R43.2@93.218,30.518
NetJ17_3: J17.3 R41.2 | length 4.1
  Top Layer w0.762: R41.2@51.308,28.448 54.17,28.448 54.932,27.686 J17.3@55.118,27.686
NetJ18_3: J18.3 R40.2 | length 4.1
  Top Layer w0.762: J18.3@100.838,27.686 101.024,27.686 101.748,28.41 R40.2@104.648,28.41
NetR21_1: R21.1 R23.2 | length 2.7
  Top Layer w0.254: R23.2@35.941,85.179 36.106,85.344 38.354,85.344 R21.1@38.481,85.217
NetR61_1: R61.1 U6.1 U6.4 | length 8.8
  Top Layer w0.254: U6.1@77.47,51.318 77.629,51.477 78.401,51.477 v2(78.74,51.816) ; U6.4@80.07,49.398 80.243,49.571 80.566,49.571 80.715,49.72 80.715,50.057 80.987,50.329 v2(81.001,50.329) 81.001,52.845 R61.1@81.153,52.997 ; R61.1@81.661,53.035 R61.1@81.788,52.908
  Bottom Layer w0.254: v2(78.74,51.816) 80.227,50.329 v2(81.001,50.329)
NetR75_1: R75.1 U7.6 | length 4.3
  Top Layer w0.254: U7.6@80.678,59.563 82.169,59.563 83.058,60.452 R75.1@84.658,60.452
QEA_A: J16.1 J20.9 | length 42.6
  Top Layer w0.254: J20.9@56.11,10.414 56.134,10.438 56.134,16.764 57.912,18.542 62.738,18.542 64.516,20.32 64.516,24.13 65.532,25.146 83.058,25.146 J16.1@85.598,27.686
QEA_B: J16.2 J20.4 | length 46.9
  Top Layer w0.254: J20.4@54.725,7.574 54.965,7.574 57.658,10.267 57.658,15.748 59.182,17.272 63.246,17.272 65.786,19.812 65.786,23.114 66.548,23.876 84.328,23.876 J16.2@88.138,27.686
QEA_I: J16.3 J20.5 | length 46.4
  Top Layer w0.254: J20.5@57.495,7.574 58.928,9.007 58.928,14.732 60.198,16.002 63.754,16.002 67.056,19.304 67.056,21.844 68.072,22.86 85.852,22.86 J16.3@90.678,27.686
RES_REF_OUT: C55.1 J22.1 | length 17.3
  Top Layer w0.254: C55.1@92.71,13.838 C55.1@92.578,13.97 v2(95.758,13.97) ; v2(99.568,13.97) 101.854,13.97 103.632,15.748 103.632,18.542 104.14,19.05 J22.1@105.918,19.05
  Bottom Layer w0.254: v2(95.758,13.97) v2(99.568,13.97)
SIN_N: C54.2 J22.9 R74.1 R76.1 | length 109.9
  Top Layer w0.254: v2(63.246,59.69) 63.383,59.69 63.637,59.944 64.578,59.944 64.727,59.795 64.727,59.573 65.08,59.22 R74.1@65.278,59.22 69.888,59.22 R76.1@70.18,58.928
  Bottom Layer w0.254: v2(63.246,59.69) 63.109,59.69 62.855,59.944 62.23,59.944 61.976,59.69 61.976,58.674 62.23,58.42 63.202,58.42 63.754,57.868 63.754,51.308 64.262,50.8 64.262,50.038 63.754,49.53 63.754,48.514 64.262,48.006 64.262,47.244 63.754,46.736 63.754,46.228 64.262,45.72 64.262,44.958 63.754,44.45 63.754,43.942 64.262,43.434 64.262,42.672 63.754,42.164 63.754,41.656 64.262,41.148 64.262,40.386 63.754,39.878 63.754,39.116 64.262,38.608 64.262,37.614 64.113,37.465 64.113,37.443 63.754,37.084 63.754,32.512 64.262,32.004 66.802,32.004 67.818,30.988 67.818,25.908 69.85,23.876 69.85,9.398 73.914,5.334 106.785,5.334 106.934,5.483 106.934,7.874 J22.9@105.918,8.89
SIN_P: C54.1 J22.10 R71.1 R74.2 | length 109.8
  Top Layer w0.254: v2(63.246,60.706) 63.383,60.706 63.637,60.452 64.578,60.452 64.727,60.601 64.727,60.823 65.08,61.176 R74.2@65.278,61.176 69.558,61.176 69.596,61.214 69.888,61.214 R71.1@70.142,61.468
  Bottom Layer w0.254: v2(63.246,60.706) 63.109,60.706 62.855,60.452 62.02,60.452 61.468,59.9 61.468,58.464 62.02,57.912 62.992,57.912 63.246,57.658 63.246,32.302 64.052,31.496 66.592,31.496 67.31,30.778 67.31,25.698 69.342,23.666 69.342,9.188 73.704,4.826 106.996,4.826 107.442,5.272 107.442,7.874 J22.10@108.458,8.89
SR-RESET: J8.7 U4.3 | length 119.6
  Top Layer w0.254: U4.3@29.337,48.895 29.36,48.872 v2(31.092,48.872)
  Bottom Layer w0.254: v2(31.092,48.872) 42.522,48.872 50.419,56.769 52.451,56.769 53.848,58.166 53.848,64.008 56.388,66.548 56.388,67.564 76.454,87.63 76.454,102.362 74.553,104.263 74.553,111.13 74.668,111.245 74.668,111.767 74.553,111.882 74.553,113.291 74.923,113.661 86.745,113.661 91.44,108.966 J8.7@98.298,108.966
SR_Latch_In: U3.4 U4.4 | length 22.4
  Top Layer w0.381: U4.4@29.337,47.625 31.115,47.625 32.067,48.578 32.067,52.387 33.401,53.721 40.259,53.721 40.513,53.721 41.529,52.705 41.529,49.971 42.575,48.925 U3.4@43.439,48.925
SR_Latch_out: IC2.12 IC3.12 R87.2 R88.1 R95.2 R96.1 U4.2 | length 101.1
  Top Layer w0.254: U4.2@29.337,50.165 29.4,50.102 30.924,50.102 v2(30.988,50.038) ; v2(73.914,88.646) 74.676,89.408 74.676,94.996 77.47,97.79 R95.2@77.47,99.314 ; v2(75.692,104.902) 76.2,104.394 77.015,104.394 77.978,103.431 IC3.12@77.978,102.746 77.978,102.061 77.47,101.553 R95.2@77.47,99.314 ; v2(75.946,109.855) 75.946,110.363 76.526,110.943 76.533,110.943 76.886,111.296 R88.1@76.886,111.506 ; R88.1@76.962,111.506 R87.2@79.248,111.506 ; R88.1@77.073,111.903 77.724,112.554 IC2.12@77.724,115.192 ; R96.1@80.01,99.314 R95.2@77.47,99.314
  Top Layer w1.27: R88.1@76.886,111.506 R88.1@76.962,111.506
  Bottom Layer w0.254: v2(30.988,50.038) 42.672,50.038 50.165,57.531 52.197,57.531 53.086,58.42 53.086,64.389 54.737,66.04 54.737,67.945 73.914,87.122 v2(73.914,88.646) ; v2(75.692,104.902) 75.946,105.156 v2(75.946,109.855)
TEMP_BusBar: C31.1 J21.5 R52.1 R54.1 | length 13.8
  Top Layer w0.254: J21.5@5.588,38.1 6.862,36.826 9.656,36.826 10.668,35.814 12.766,35.814 C31.1@12.954,36.002 13.03,36.078 R54.1@13.03,38.862 R52.1@13.03,41.402
TEMP_BusCAP: C34.1 J21.1 R55.1 R57.1 | length 16.6
  Top Layer w0.254: J21.1@5.588,43.18 5.588,46.482 6.35,47.244 C34.1@13.208,47.244 13.246,47.282 R55.1@13.246,52.578
TEMP_IGBT1: C30.1 J21.4 R51.1 R53.1 | length 18.7
  Top Layer w0.254: J21.4@8.128,40.64 11.027,40.64 11.176,40.789 11.176,42.777 11.325,42.926 16.764,42.926 17.86,41.83 18.302,41.83 C30.1@18.796,41.336 19.088,41.628 R53.1@19.088,43.942 R51.1@19.088,46.482
TEMP_IGBT2: C36.1 J21.8 R56.1 R58.1 | length 19.4
  Top Layer w0.254: J21.8@8.128,35.56 8.303,35.385 9.319,35.385 9.652,35.052 9.652,32.766 10.16,32.258 16.002,32.258 16.51,31.75 17.814,30.446 18.764,30.446 C36.1@18.796,30.414 18.796,33.02 18.796,35.268 R56.1@19.088,35.56
TEMP_IGBT3: C38.1 J21.9 R59.1 R60.1 | length 14.2
  Top Layer w0.254: J21.9@5.588,33.02 5.588,31.496 5.842,31.242 8.636,31.242 ; C38.1@9.332,29.464 9.398,29.53 9.398,30.48 8.636,31.242 ; R60.1@13.03,27.94 13.03,30.69 12.677,31.043 12.467,31.043 12.268,31.242 8.636,31.242
UART_RX: J5.1 J13.3 | length 69.5
  Top Layer w0.254: J5.1@13.625,7.574 13.625,15.022 36.703,38.1 43.434,38.1 53.086,47.752 53.086,54.102 54.349,55.365 54.857,55.365 J13.3@55.118,55.626
UART_TX: J5.2 J13.4 | length 65.3
  Top Layer w0.254: J5.2@16.395,7.574 16.395,7.735 16.395,16.141 37.592,37.338 44.069,37.338 53.844,47.113 53.844,51.812 J13.4@55.118,53.086
VBUS: J1.8 R10.1 | length 22.3
  Top Layer w0.254: J1.8@7.874,67.564 7.62,67.564 7.62,67.31 6.604,66.294 4.064,66.294 3.556,65.786 3.556,58.674 4.064,58.166 12.992,58.166 R10.1@13.246,58.42
VBUS_FIltered: C7.1 R10.2 R18.1 R19.1 U2.9 U2.10 | length 43.7
  Top Layer w0.254: C7.1@14.986,55.88 14.986,58.204 R10.2@15.202,58.42 ; C7.1@15.174,55.88 15.174,55.814 16.83,55.814 17.907,54.737 17.907,50.673 19.558,49.022 27.051,49.022 27.686,49.657 27.686,52.175 28.343,52.832 31.369,52.832 33.274,54.737 33.274,56.882 34.177,57.785 U2.9@34.589,57.785 U2.10@34.589,59.055
  Top Layer w0.381: U2.9@34.589,57.785 36.449,57.785 37.211,57.023 R19.1@38.481,57.023 ; U2.10@34.589,59.055 36.449,59.055 37.211,59.817 R18.1@38.481,59.817 ; R19.1@38.481,57.175 R19.1@38.633,57.023 ; R18.1@38.481,59.741 R18.1@38.557,59.817
VbusRef: C13.1 R22.1 R24.2 U2.11 | length 19
  Top Layer w0.254: R24.2@24.219,51.435 24.181,51.473 R22.1@24.181,54.229 25.997,54.229 C13.1@26.505,53.721
  Top Layer w0.381: C13.1@26.505,53.721 31.369,53.721 32.385,54.737 32.385,59.563 33.147,60.325 U2.11@34.589,60.325
VOLTAGE-A: C27.1 J7.3 R34.2 | length 11.8
  Top Layer w0.254: J7.3@57.658,119.126 60.198,119.126 60.96,119.888 60.96,121.666 61.468,122.174 C27.1@64.478,122.174 64.402,122.098 64.402,119.786 R34.2@64.554,119.634
VOLTAGE-B: C26.1 J7.4 R33.2 | length 9.4
  Top Layer w0.254: J7.4@57.658,116.586 64.102,116.586 C26.1@64.356,116.84 64.554,116.642 R33.2@64.554,114.3
VOLTAGE-C: C25.1 J7.5 R32.2 | length 11.1
  Top Layer w0.254: J7.5@57.658,114.046 57.912,114.3 60.198,114.3 60.96,113.538 60.96,112.522 61.722,111.76 C25.1@64.356,111.76 64.516,111.6 R32.2@64.516,109.22
pads on no net: IC4.13 J5. J6.2 J6.5 J6.6 J6.7 J6.8 J6.9 J6.10 J7.9 J8.9 J8.10 J9.2 J9.3 J9.4 J9.5 J9.6 J9.7 J9.8 J9.9 J9.10 J10.1 J10.3 J10.5 J10.7 J11.1 J11.2 J11.3 J11.5 J11.6 J12.2 J12.3 J12.4 J12.5 J12.6 J12.7 J12.8 J12.9 J12.10 J13.2 J13.5 J13.6 J13.10 J14.10 J15.1 J15.2 J15.3 J20. U3.1 U4.13 U5.3 U5.11
copper on no net:
  other v3: 3.048,3.81 110.49,3.81 3.048,132.08 110.49,132.08

## Polygon pours and split planes (outlines as drawn)
12V_N on Bottom Layer "Bottom Layer-12V_N" (solid, pour order 26): 18.923,120.523 20.447,118.999 22.987,118.999 24.003,120.015 24.003,122.809 23.749,123.063 19.812,123.063 18.923,122.174
12V_N on Bottom Layer "Bottom Layer-12V_N 1" (solid, pour order 22): 12.573,122.301 16.256,122.301 17.145,121.412 17.145,119.253 16.256,118.364 12.7,118.364 11.684,119.38 11.684,121.412
12V_P on Bottom Layer "Bottom Layer-12V_P" (solid, pour order 20): 18.796,125.857 20.32,127.381 22.86,127.381 23.876,126.365 23.876,123.571 23.622,123.317 19.685,123.317 18.796,124.206
12V_P on Bottom Layer "Bottom Layer-12V_P 1" (solid, pour order 19): 12.573,127.254 16.256,127.254 17.145,126.365 17.145,124.206 16.256,123.317 12.7,123.317 11.684,124.333 11.684,126.365
no net on Bottom Layer "Bottom Layer-GND" (solid, pour order 1): -1.778,25.4
GND on Top Layer "Top Layer-GND" (solid, pour order 70): 1.016,27.305 5.461,22.86 20.574,22.86 25.908,28.194 25.908,36.83 28.448,39.37 43.434,39.37 52.451,48.387 52.451,83.185 44.958,90.678 7.62,90.678 1.016,84.074
+12 on Top Layer "Top Layer-+12" (solid, pour order 65): 28.956,97.663 29.337,97.282 32.258,97.282 37.084,102.108 37.084,105.156 37.084,106.553 36.576,107.061 32.893,107.061 32.639,106.807 32.639,105.156 32.639,100.965 30.861,99.187 29.337,99.187 28.956,98.806
+12 on Top Layer "Top Layer-+12 1" (solid, pour order 28): 26.67,126.873 26.416,126.619 26.416,123.449 26.682,123.183 36.437,123.183 36.842,123.588 36.842,126.099 36.068,126.873
12V_N on Top Layer "Top Layer-12V_N" (solid, pour order 24): 18.892,120.519 20.416,118.995 22.956,118.995 23.972,120.011 23.972,122.84 23.753,123.059 19.781,123.059 18.892,122.17
12V_N on Top Layer "Top Layer-12V_N 1" (solid, pour order 21): 12.573,122.301 16.256,122.301 17.145,121.412 17.145,119.253 16.256,118.364 12.7,118.364 11.684,119.38 11.684,121.412
12V_P on Top Layer "Top Layer-12V_P" (solid, pour order 18): 12.573,127.254 16.256,127.254 17.145,126.365 17.145,124.206 16.256,123.317 12.7,123.317 11.684,124.333 11.684,126.365
12V_P on Top Layer "Top Layer-12V_P 1" (solid, pour order 17): 18.796,125.857 20.32,127.381 22.86,127.381 23.876,126.365 23.876,123.571 23.622,123.317 19.685,123.317 18.796,124.206
no net on Top Layer "Top Layer-No Net 1" (solid, pour order 14): 4.826,127.889
no net on Top Layer "Top Layer-No Net" (solid, pour order 3): -3.81,134.366
+5 on Power "Power-+5" (solid, pour order 113): 0,88.9 4.064,84.836 4.064,10.033 6.858,7.239 84.074,7.239 85.09,8.255 89.408,8.255 91.44,6.223 91.44,0 113.538,0 113.538,37.211 111.379,37.211 106.934,32.766 106.934,24.638 105.791,23.495 102.616,23.495 100.838,25.273 100.838,32.131 99.695,33.274 95.123,33.274 92.075,36.322 92.075,41.656 91.44,42.291 51.689,42.291 49.276,39.878 39.878,39.878 38.227,39.878 36.957,41.148 36.957,47.625 37.592,48.26 45.339,48.26 46.228,49.149 46.228,80.01 47.625,81.407 50.927,81.407 52.197,80.137 52.197,69.723 53.594,68.326 56.261,68.326 57.023,67.564 57.023,64.516 54.864,62.357 54.864,52.451 56.896,50.419 95.25,50.419 96.774,48.895 96.774,39.751 97.79,38.735 103.378,38.735 104.775,40.132 104.775,61.087 101.219,64.643 101.219,80.137 100.076,81.28 97.409,81.28 84.328,94.361 84.328,100.584 83.693,101.219 73.533,101.219 72.009,102.743 72.009,109.601 73.533,111.125 73.533,111.887 72.263,113.157 70.358,113.157 69.596,112.395 69.596,100.584 70.612,99.568 74.272,99.568 75.438,98.402 75.438,94.488 73.914,92.964 68.961,92.964 68.961,93.091 67.691,94.361 67.691,96.774 67.31,97.155 44.196,97.155 43.307,96.266 43.307,57.785 27.432,41.91 27.432,27.432 24.511,24.511 8.001,24.511 6.096,26.416 6.096,29.845 7.62,31.369 8.509,31.369 9.398,32.258 9.398,85.217 8.509,86.106 4.953,86.106 2.159,88.9 2.159,96.266 4.064,98.171 16.764,98.171 17.399,98.806 17.399,99.695 17.272,99.695 15.24,101.727 15.24,108.585 14.224,109.601 4.572,109.601 4.445,109.728 2.667,109.677 2.667,113.411 4.064,114.808 13.335,114.808 13.462,114.935 17.907,114.935 22.479,110.363 22.479,105.283 25.019,102.743 46.609,102.743 49.784,105.918 49.784,129.032 51.435,130.683 55.118,130.683 57.023,128.778 87.63,128.778 90.678,125.73 90.678,96.012 98.425,88.265 103.251,88.265 105.791,85.725 105.791,66.675 110.835,61.631 110.744,61.595 110.744,46.228 113.538,46.228 113.538,134.366 42.418,134.366 42.418,134.112 42.926,133.604 42.926,105.156 41.656,103.886 28.956,103.886 27.813,105.029 27.813,110.617 35.941,110.617 36.83,111.506 36.83,115.824 35.941,116.713 0,116.713
no net on Power "Power-No Net 2" (solid, pour order 106): 27.559,26.797
no net on Power "Power-No Net 3" (solid, pour order 103): 27.813,110.045
no net on Power "Power-No Net 4" (solid, pour order 95): 3.302,108.966
+12 on Power "Power-+12" (solid, pour order 68): 0,0 90.043,0 90.043,5.715 88.646,7.112 86.233,7.112 84.836,5.715 5.842,5.715 2.794,8.763 2.794,85.344 2.286,85.852 0,85.852 0,84.836
+3V3 on Power "Power-+3V3" (solid, pour order 61): 3.937,112.014 4.699,111.252 15.748,111.252 17.145,109.855 17.145,101.854 21.204,97.795 59.12,97.79 67.945,97.79 68.58,97.155 68.58,94.869 69.469,93.98 73.533,93.98 74.295,94.742 74.295,97.79 73.025,99.06 67.945,99.06 67.437,99.568 67.437,100.33 68.849,101.742 68.849,112.875 70.152,114.178 72.263,114.178 74.074,112.367 74.153,112.367 74.153,110.764 74.173,110.744 74.153,110.724 74.153,110.617 72.522,108.986 72.522,103.378 74.041,101.859 84.181,101.859 85.09,100.95 85.09,97.79 84.836,97.536 84.836,94.869 97.536,82.169 100.457,82.169 102.108,80.518 102.108,65.024 105.664,61.468 105.664,38.608 104.267,37.211 96.774,37.211 95.25,38.735 95.25,47.752 94.107,48.895 56.388,48.895 53.721,51.562 53.721,64.643 54.229,65.151 55.626,65.151 56.134,65.659 56.134,66.421 55.626,66.929 52.959,66.929 52.197,66.167 52.197,48.895 47.625,44.323 40.513,44.323 40.005,43.815 40.005,42.291 41.021,41.275 48.641,41.275 51.308,43.942 92.075,43.942 93.218,42.799 93.218,37.465 95.885,34.798 100.711,34.798 102.235,33.274 102.235,25.4 102.87,24.765 105.029,24.765 105.664,25.4 105.664,33.274 110.871,38.481 112.395,38.481 113.03,39.116 113.03,40.513 112.395,41.148 110.871,41.148 109.601,42.418 109.601,61.087 104.648,66.04 104.648,85.09 102.743,86.995 97.79,86.995 89.408,95.377 89.408,124.841 86.36,127.889 56.261,127.889 54.483,129.667 52.324,129.667 51.181,128.524 51.181,105.41 47.625,101.854 22.86,101.854 20.701,104.013 20.701,109.601 16.383,113.919 4.572,113.919 3.937,113.284
no net on Power "Power-No Net" (solid, pour order 47): 106.807,58.928
no net on Power "Power-No Net 1" (solid, pour order 36): 53.721,48.006
+3V3VA on Power "Power-+3V3VA" (solid, pour order 35): 38.1,47.625 37.592,47.117 37.592,45.339 38.227,44.704 47.117,44.704 51.308,48.895 51.308,79.248 50.673,79.883 47.498,79.883 46.99,79.375 46.99,77.724 46.99,48.387 46.228,47.625
+12 on Power "Power-+12 1" (solid, pour order 27): 29.57,109.474 28.829,108.839 28.829,105.41 29.718,104.521 40.259,104.521 41.529,105.791 41.529,125.857 40.513,126.873 26.543,126.873 25.527,125.857 25.527,120.904 26.924,119.507 37.084,119.507 37.973,118.618 37.973,110.363 37.084,109.474
12V_P on Power "Power-12V_P" (solid, pour order 10): 3.81,118.618 4.826,117.602 22.606,117.602 23.876,118.872 23.876,126.619 22.606,127.889 4.826,127.889 3.81,126.873
+5VA on Power "Power-+5VA" (solid, pour order 9): 22.733,25.781 25.908,28.956 25.908,41.783 42.545,58.42 42.545,96.393 41.656,97.282 5.334,97.282 3.429,95.377 3.429,89.154 5.08,87.503 9.398,87.503 10.668,86.233 10.668,32.131 9.398,30.861 8.001,30.861 6.858,29.718 6.858,27.051 8.128,25.781
GND on GND "GND-GND" (solid, pour order 93): 0,0 113.538,0 113.538,134.366 0,134.366 0,84.963 0,20.701
12V_N on GND "GND-12V_N" (solid, pour order 15): 3.81,126.873 3.937,126.873 4.953,127.889 22.606,127.889 23.876,126.619 23.876,118.872 22.606,117.602 4.826,117.602 3.81,118.618
no net on GND "GND-No Net" (solid, pour order 13): 4.953,127.889

## Other copper
GND:
  pour cut-out: 54.864,48.006 54.864,83.82 46.228,92.456 7.493,92.456 1.262,86.225 1.262,84.32 7.62,90.678 44.958,90.678 52.451,83.185 52.451,48.387 43.434,39.37 28.448,39.37 25.908,36.83 25.908,28.067 20.701,22.86 5.207,22.86 1.262,26.805 1.262,20.701 21.717,20.701 28.194,27.178 28.194,35.306 30.099,37.211 44.069,37.211
Power:
  pour cut-out: 20.955,21.336 4.064,21.336

## Silkscreen, mask and mechanical layers (free items; w line width, h text height)
Top Overlay:
  drawing of 3 lines, arcs and shapes, not listed
  text "12VP" at 1.524,127.508 h1.02 r270
  text "DNP" at 58.016,126.642 h0.8 r90
  text "DNP" at 55.476,126.388 h0.8 r90
  text "12VN" at 1.524,122.174 h1.02 r270
  text "A" at 62.126,121.562 h0.8
  text "B" at 62.126,116.228 h0.8
  text "PHASE-A" at 111.864,115.974 h0.8 r90
  text "3V3" at 1.724,113.846 h1 r270
  text "C" at 62.126,111.148 h0.8
  text "DNP" at 74.826,111.148 h0.8
  text "GND" at 1.724,110.29 h1 r270
  text "5V" at 1.724,105.972 h1 r270
  text "AGU POWER LAB.  / POWER BOARD / DESIGNED BY / MURATCAN YAZICI" at 37.899,104.394 h0.8
  text "LC" at 5.994,94.894 h0.76
  text "DNP" at 69.238,94.892 h0.8
  text "PHASE-B" at 111.864,94.13 h0.8 r90
  text "+5" at 11.58,93.876 h0.8
  text "+3V3" at 18.184,93.876 h0.8
  text "+12" at 26.058,93.876 h0.8
  text "DNP" at 79.398,93.368 h0.8
  text "A" at 11.326,79.144 h0.8
  text "CURRENT SENS." at 2.309,74.907 h0.8 r270
  text "DNP" at 24.661,71.905 h0.8
  text "DNP" at 37.869,71.905 h0.8
  text "PHASE-C" at 111.864,71.778 h0.8 r90
  text "B" at 11.58,71.016 h0.8
  text "DNP" at 24.661,69.619 h0.8
  text "DNP" at 37.869,69.111 h0.8
  text "DNP" at 58.016,64.158 h0.8 r90
  text "DNP" at 55.476,63.904 h0.8 r90
  text "C" at 11.326,63.142 h0.8
  text "DNP" at 24.661,59.459 h0.8
  text "DNP" at 38.123,59.205 h0.8
  text "GLB" at 108.712,57.912 h1.02
  text "DNP" at 24.661,56.665 h0.8
  text "DNP" at 38.377,56.665 h0.8
  text "GGG" at 2.667,56.007 h1.02 r270
  text "CV" at 108.585,52.324 h1.02
  text "A" at 105.029,47.371 h1.02
  text "LC" at 39.522,46.888 h0.76
  text "+5" at 110.236,46.228 h1.02 r90
  text "TEMPERATURE SENS." at 2.436,44.808 h0.8 r270
  text "GND" at 110.236,42.164 h1.02 r90
  text "B" at 105.029,41.656 h1.02
  text "3V3" at 110.236,38.354 h1.02 r90
  text "C" at 105.029,36.068 h1.02
  text "DNP" at 77.366,32.87 h0.8 r270
  text "DNP" at 92.606,32.616 h0.8 r270
  text "CASE LED" at 30.63,28.344 h0.8
  text "1" at 37.996,28.344 h0.8
  text "2" at 43.33,28.344 h0.8
  text "3" at 49.172,28.344 h0.8
  text "DNP" at 51.92,26.058 h0.8 r90
  text "DNP" at 105.26,26.058 h0.8 r90
  text "RESOLVER CONN." at 112.268,7.366 h1.02 r90
  text "UART   CAN-A" at 13.208,3.556 h1.02
  text "ENCODER CONN." at 45.212,3.556 h1.02
Mechanical 1:
  the board outline again, w0.508

## Text inside footprints (layer, text, board x,y; h text height)
C15: Top Overlay "4.7u" at 13.081,122.364 h1